# Altium PCB FRDM-TFC.PcbDoc (part 1 of 2)
Units mil, origin at the board's own origin, x right, y up, seen from the top; angles counter-clockwise.
Board outline 3200 x 2100 mil, 2 copper layers (Top Layer, Bottom Layer), stack 15.3 mil thick; 77 components, 81 nets, 511 pads, 817 vias.
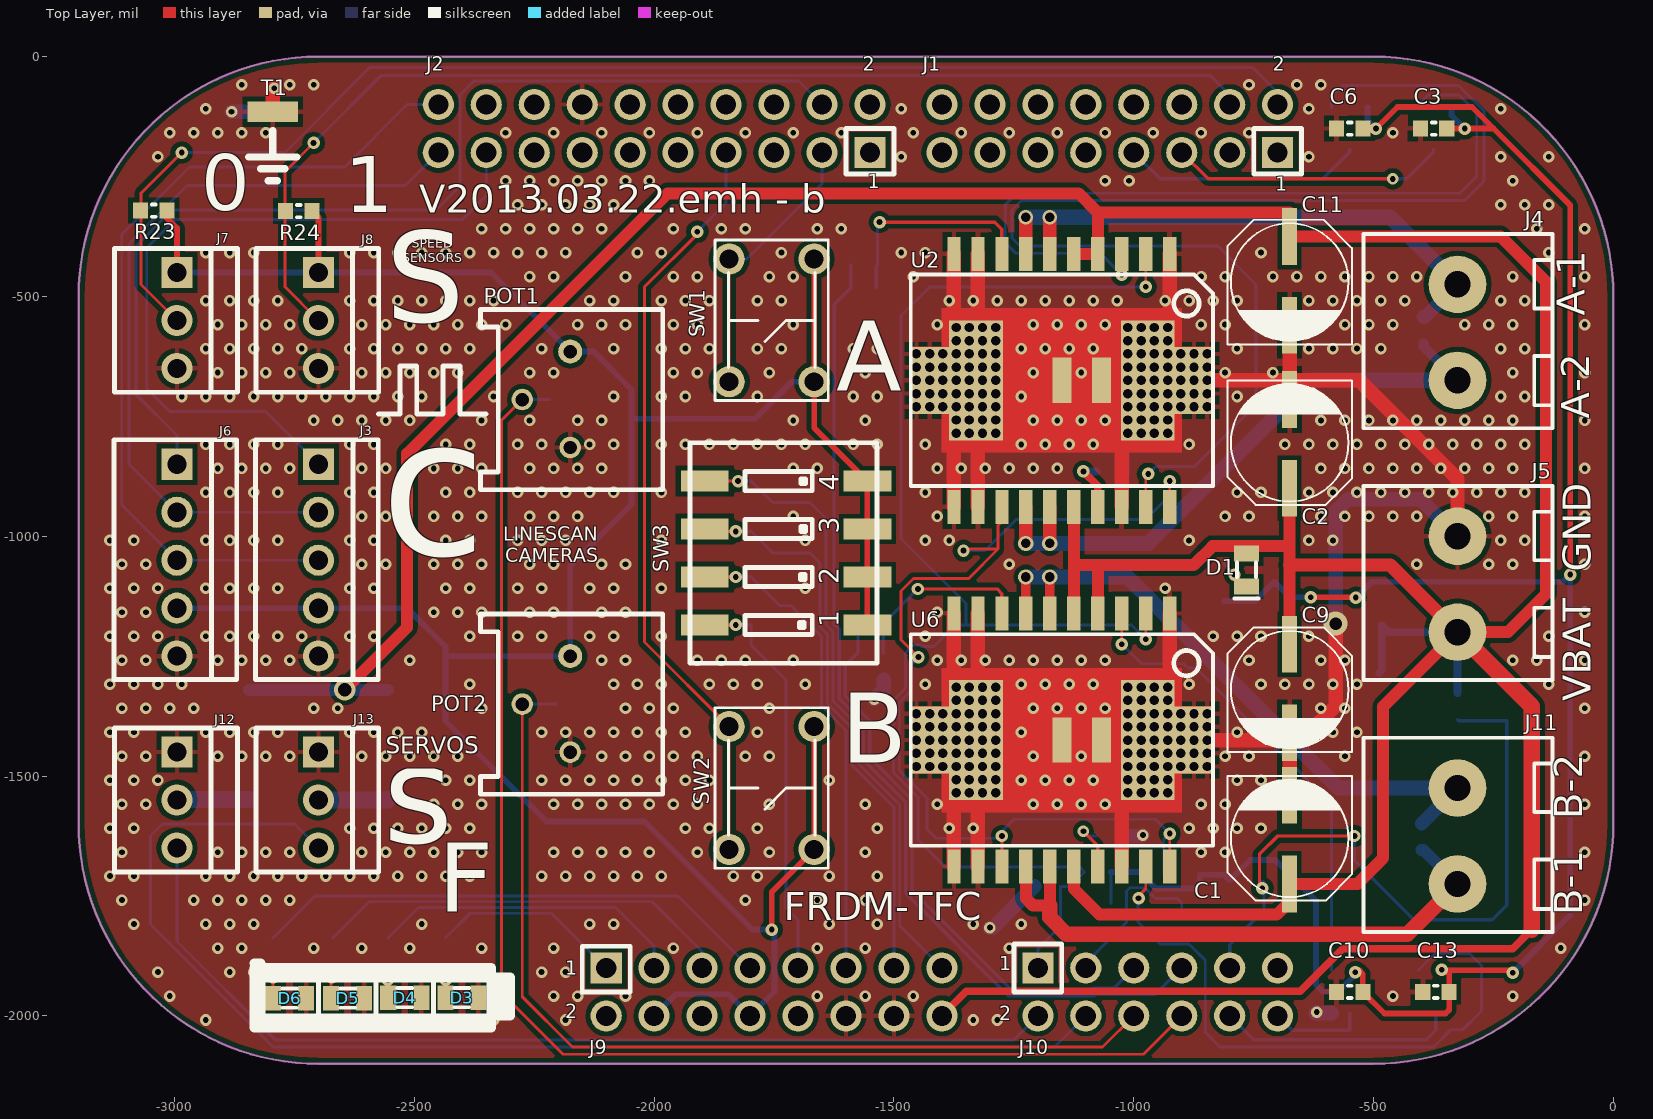
[diagram p0: Top Layer view]
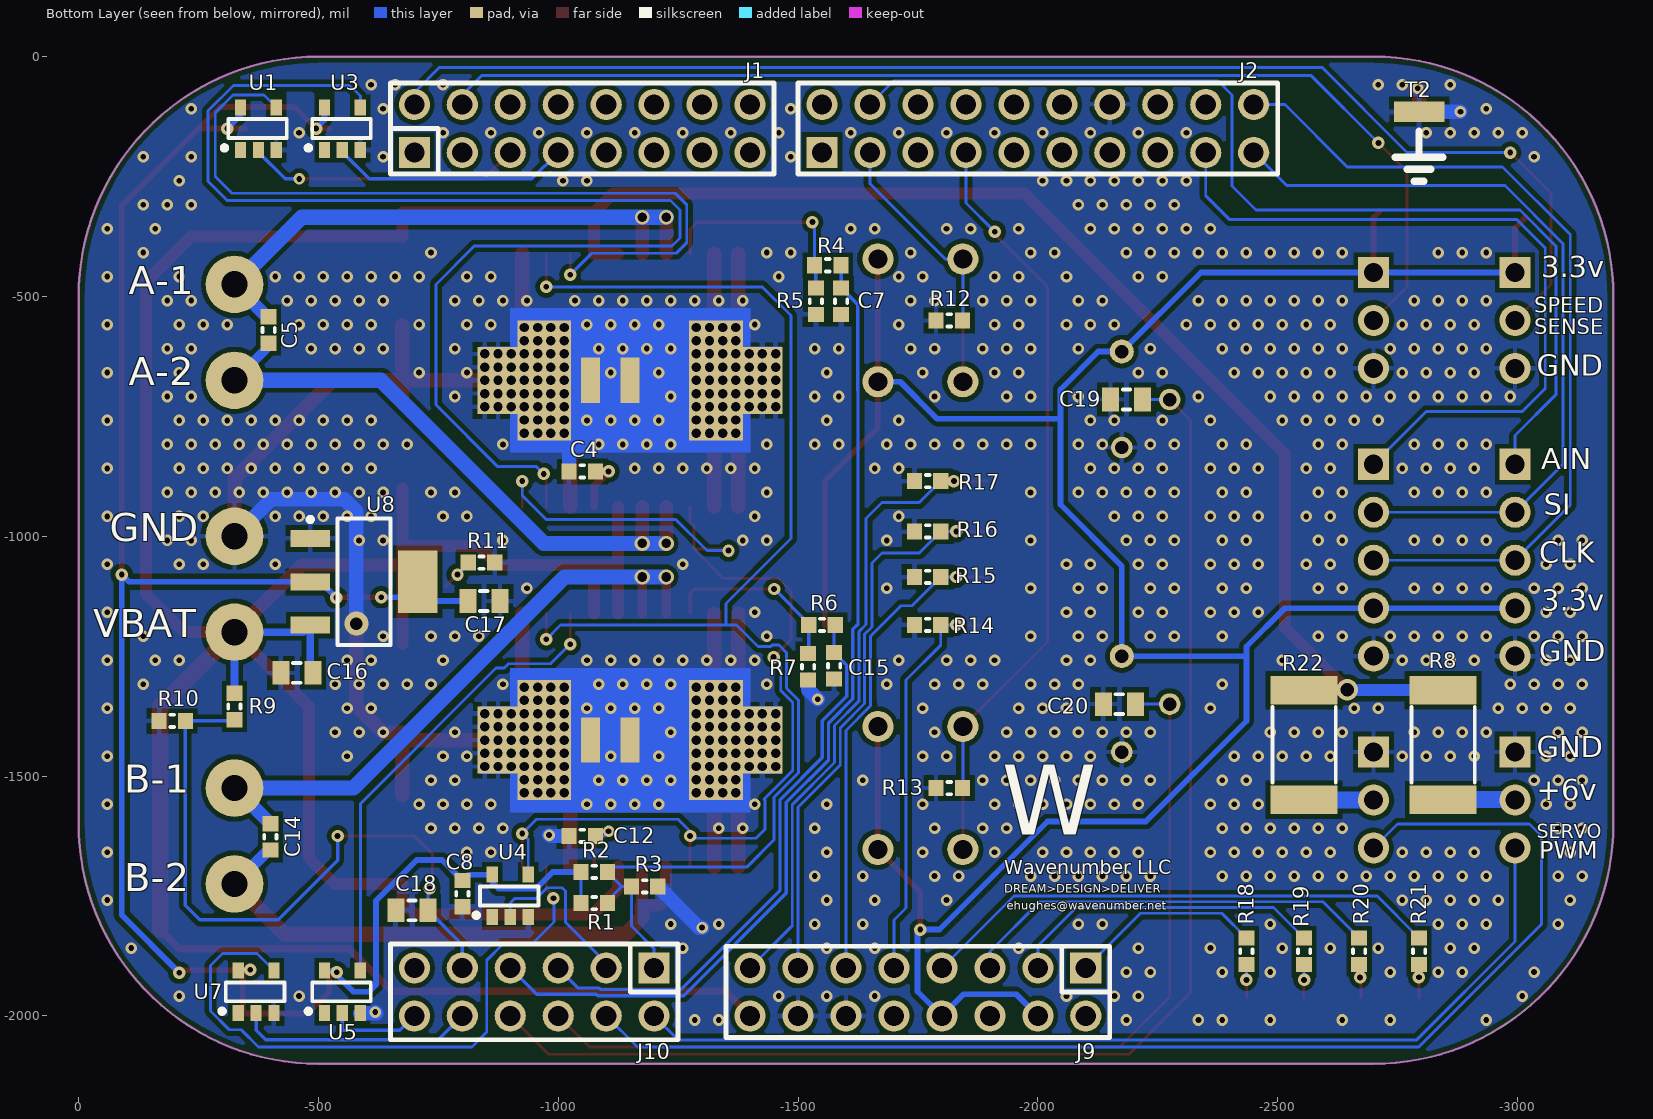
[diagram p1: Bottom Layer view, seen from below]
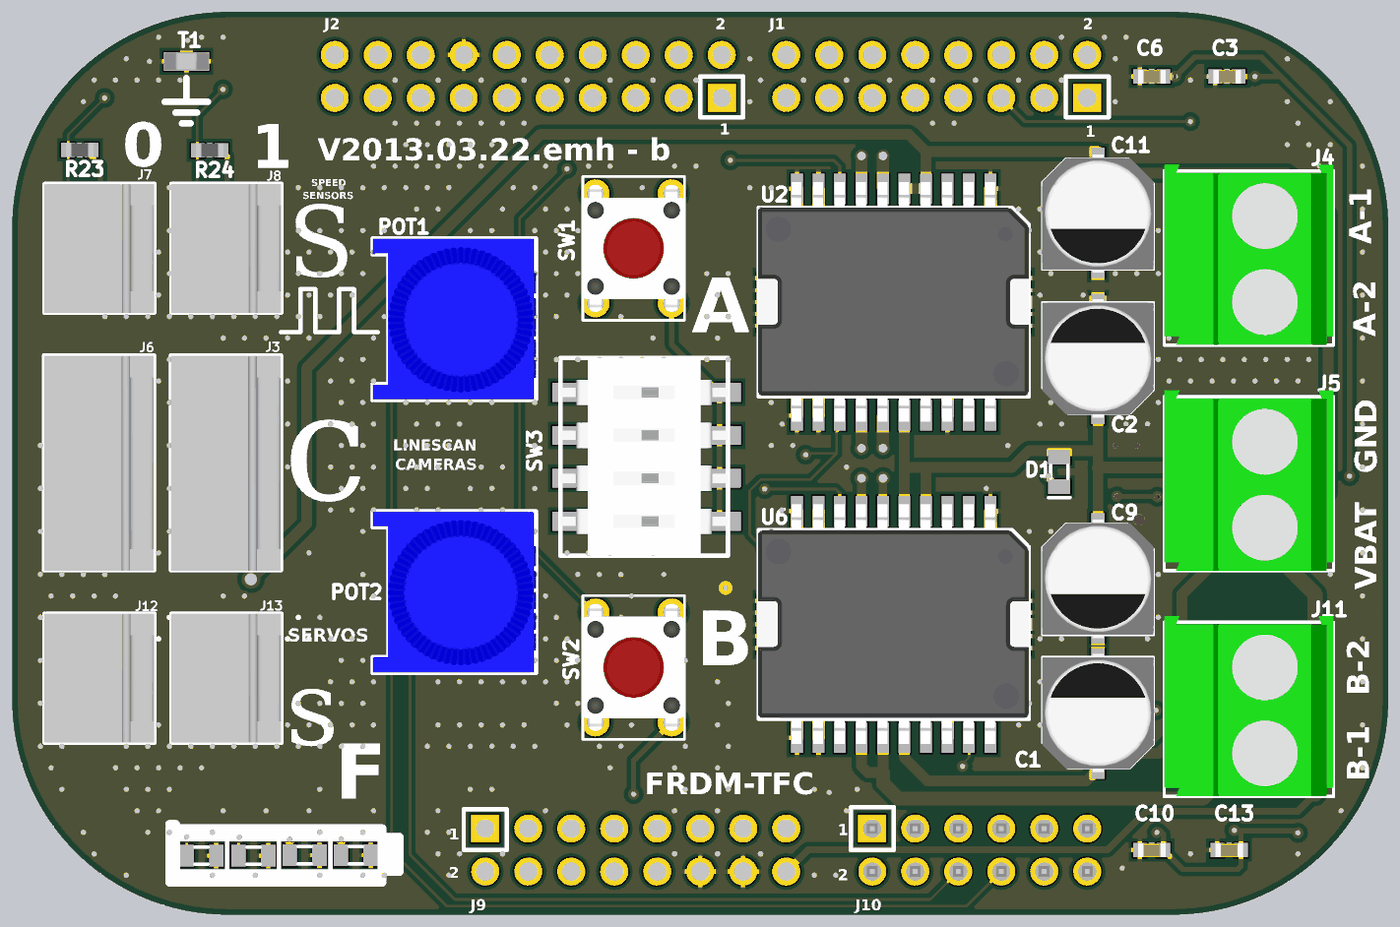
[diagram p3: 3D render of the assembled board from above, using the file's embedded part models]
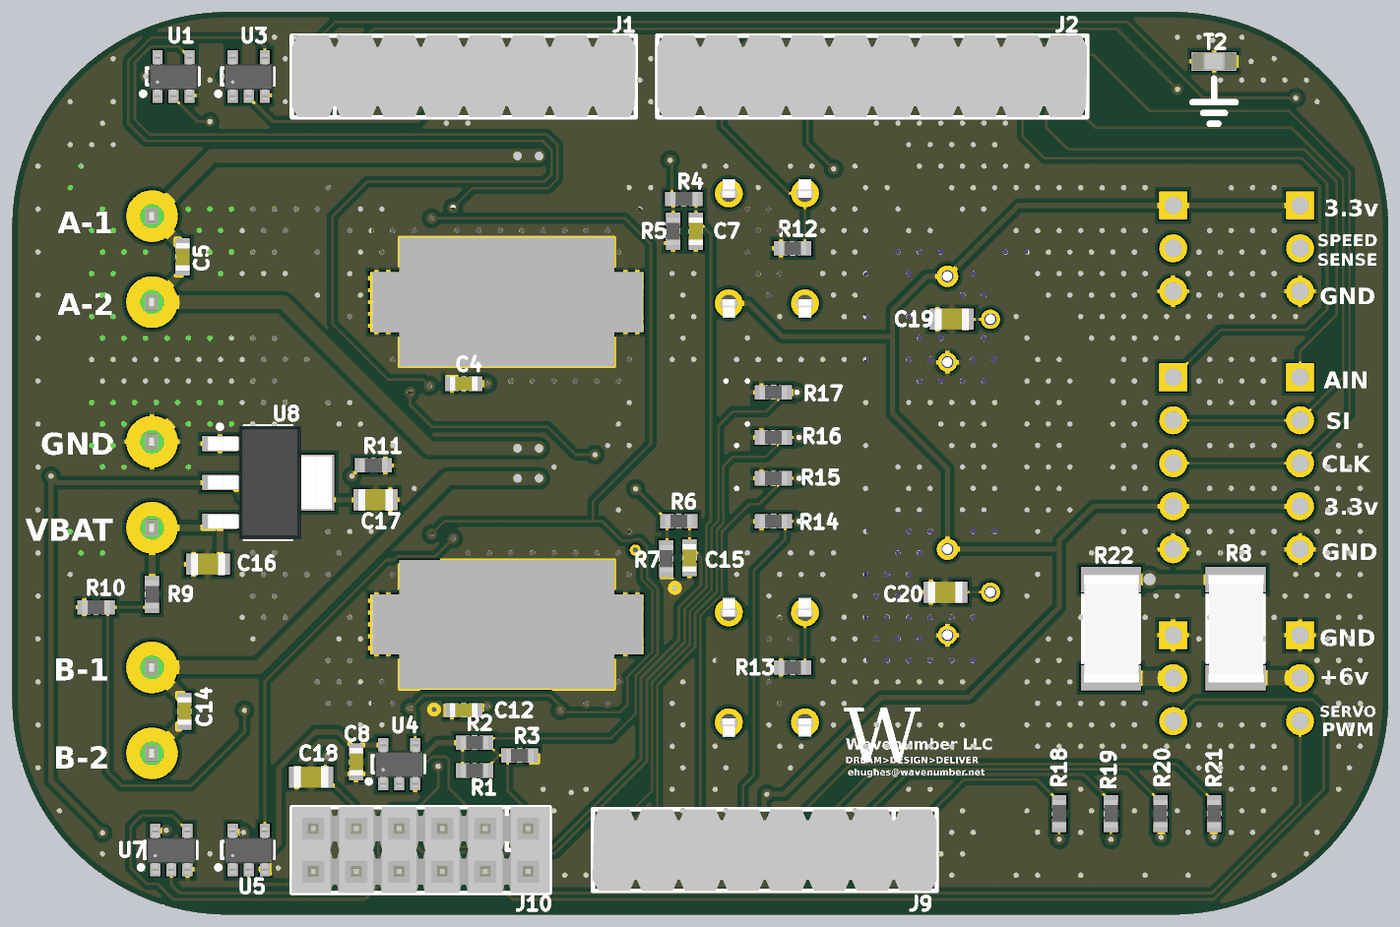
[diagram p4: 3D render of the assembled board from below, using the file's embedded part models]

## Layer stack, top to bottom
Top Layer: signal copper 1.4
Dielectric: core 12.5, FR-4, Dk 4.8
Bottom Layer: signal copper 1.4

## Board outline
-3200,-1600 ccw(c-2700,-1600) -2700,-2100 -500,-2100 ccw(c-500,-1600) 0,-1600 0,-500 ccw(c-500,-500) -500,0 -2700,0 ccw(c-2700,-500) -3200,-500

## Design rules (kind name [scope] priority, off if disabled: settings)
Clearance Polygon [(InNet('GND') AND InPoly)] p1: gap=10
Clearance [All] p2: gap=6
ComponentClearance [All] p1: gap=0 collisioncheckmode=3 verticalgap=0 showdistances=FALSE
Height [All] p1: minheight=0 maxheight=1500 prefheight=500
HoleSize [All] p1: absolutevalues=TRUE maxlimit=250 minlimit=1 maxpercent=80.000 minpercent=20.000
HoleToHoleClearance [All] p1: gap=2 allowstackedmicrovias=TRUE
MinimumSolderMaskSliver [All] p1: minsoldermaskwidth=0
PlaneConnect [All] p1: planeconnectstyle=Direct reliefexpansion=20 reliefentries=4 reliefconductorwidth=10 reliefairgap=10
PolygonConnect PolygonConnect_1 [IsVia] p1: connectstyle=Direct reliefconductorwidth=10 reliefentries=4 polygonreliefangle="90 Angle" airgapwidth=10
PolygonConnect [All] p2: connectstyle=Relief reliefconductorwidth=10 reliefentries=4 polygonreliefangle="90 Angle" airgapwidth=10
RoutingVias [All] p1: holewidth=12 width=24 viastyle="Through Hole" minholewidth=12 minwidth=24 maxholewidth=50 maxwidth=100
ShortCircuit ShortCircuit_1 [HasFootprint('4-40 X 250') vs HasFootprint('4-40 X 250')] p1: allowed=TRUE
ShortCircuit [All] p2: allowed=FALSE
SilkToSilkClearance [All] p1: silktosilkclearance=0
SilkToSolderMaskClearance SilkscreenOverComponentPads [IsPad] p1: minsilkscreentomaskgap=0 clearancetoexposedcopper=TRUE
SolderMaskExpansion [All] p1: expansion=4
Width [All] p1: maxlimit=100 minlimit=6 preferedwidth=6
19 further rules are at their usual default settings.

## Classes and differential pairs
component class FRDM-TFC: C16 C17 C18 C19 C20 D1 D3 D4 D5 D6 J1 J2 J3 J4 J5 J6 J7 J8 J9 J10 J11 J12 J13 POT1 POT2 R8 R9 R10 R11 R12 R13 R14 R15 R16 R17 R18 R19 R20 R21 R22 R23 R24 SW1 SW2 SW3 T1 T2 U8
component class U_H-BRIDGE: C1 C2 C3 C4 C5 C6 C7 C8 C9 C10 C11 C12 C13 C14 C15 R1 R2 R3 R4 R5 R6 R7 U1 U2 U3 U4 U5 U6 U7 U24

## Components (designator, comment, footprint, x,y, rotation, side; value= is the part's Value field where it differs from the comment)
C1 "47uF" PANASONIC_D -675,-1500 r180 top
C2 "47uF" PANASONIC_D -675,-675 r180 top
C3 "0.1uF" C0603 -375,-150 r0 top
C4 "33nF" C0603 -1050,-865 r0 bottom
C5 "33nF" C0603 -396,-570 r90 bottom
C6 "0.1uF" C0603 -550,-150 r0 top
C7 "0.1uF" C0603 -1590,-510 r270 bottom
C8 "0.1uF" C0603 -800,-1745 r90 bottom
C9 "47uF" PANASONIC_D -675,-1450 r0 top
C10 "0.1uF" C0603 -550,-1950 r0 top
C11 "47uF" PANASONIC_D -675,-600 r0 top
C12 "33nF" C0603 -1050,-1625 r0 bottom
C13 "0.1uF" C0603 -370,-1950 r0 top
C14 "33nF" C0603 -400,-1627 r90 bottom
C15 "0.1uF" C0603 -1575,-1270 r270 bottom
C16 "1.0uF" C0805 -455,-1285 r0 bottom
C17 "1.0uF" C0805 -845,-1135 r180 bottom
C18 "1.0uF" C0805 -695,-1780 r180 bottom
C19 "1.0uF" C0805 -2185,-715 r180 bottom
C20 "1.0uF" C0805 -2170,-1350 r180 bottom
D1 "Value" "LED_0805 - GREEN" -765,-1070 r270 top
D3 "Value" "LED_0805 - GREEN" -2401,-1962 r0 top
D4 "Value" "LED_0805 - GREEN" -2520,-1962 r0 top
D5 "Value" "LED_0805 - GREEN" -2639,-1963 r0 top
D6 "Value" "LED_0805 - GREEN" -2760,-1963 r0 top
J1 "67996-416HLF" 67996-416HLF -1050,-150 r180 bottom locked
J2 "67996-420HLF" 67996-420HLF -2000,-150 r180 bottom locked
J3 "640454-5" 640454-5 -2700,-1050 r270 top locked
J4 "282857-2" 282857-2 -325,-575 r90 top locked
J5 "282857-2" 282857-2 -325,-1100 r90 top
J6 "640454-5" 640454-5 -2995,-1050 r270 top locked
J7 "640454-3" 640454-3 -2995,-550 r270 top locked
J8 "640454-3" 640454-3 -2700,-550 r270 top
J9 "67996-416HLF" 67996-416HLF -1750,-1950 r0 bottom locked
J10 "67996-412HLF" 67996-412HLF -950,-1950 r0 bottom locked
J11 "282857-2" 282857-2 -325,-1625 r90 top
J12 "640454-3" 640454-3 -2995,-1550 r270 top
J13 "640454-3" 640454-3 -2700,-1550 r270 top
POT1 "100k" 3386P -2225,-715 r270 top
POT2 "100k" 3386P -2225,-1350 r270 top
R1 "10k" R0603 -1075,-1765 r0 bottom
R2 "10k" R0603 -1075,-1700 r0 bottom
R3 "10k" R0603 -1180,-1730 r0 bottom
R4 "10k" R0603 -1562,-435 r180 bottom
R5 "220" R0603 -1537,-510 r90 bottom
R6 "10k" R0603 -1550,-1185 r180 bottom
R7 "220" R0603 -1521,-1272 r90 bottom
R8 "1" R2512 -2845,-1435 r270 bottom
R9 "47k" R0603 -325,-1355 r270 bottom
R10 "10k" R0603 -195,-1385 r0 bottom
R11 "470" R0603 -840,-1055 r0 bottom
R12 "10k" R0603 -1815,-550 r180 bottom
R13 "10k" R0603 -1815,-1525 r180 bottom
R14 "10k" R0603 -1770,-1185 r180 bottom
R15 "10k" R0603 -1770,-1085 r180 bottom
R16 "10k" R0603 -1770,-990 r180 bottom
R17 "10k" R0603 -1770,-885 r180 bottom
R18 "220" R0603 -2435,-1865 r270 bottom
R19 "220" R0603 -2555,-1865 r270 bottom
R20 "220" R0603 -2670,-1865 r270 bottom
R21 "220" R0603 -2795,-1865 r270 bottom
R22 "1" R2512 -2555,-1435 r270 bottom
R23 "10k" R0603 -3043,-321 r0 top
R24 "10k" R0603 -2741,-322 r0 top
SW1 "EVQ-PAG05R" EVQ-PAG05R -1755,-550 r180 top
SW2 "EVQ-PAG05R" EVQ-PAG05R -1755,-1525 r180 top
SW3 "219-4MST" 219-4MST -1725,-1035 r90 top
T1 "PC TEST POINT MINIATURE SMT" SMT_TEST_5015 -2795,-115 r0 top
T2 "PC TEST POINT MINIATURE SMT" SMT_TEST_5015 -2795,-115 r0 bottom
U1 "M74VHC1GT50DTT1G" SOT95P245X145-5L -375,-150 r90 bottom
U2 "MC33887APVW" "FREESCALE HSOP-20" -1150,-675 r270 top
U3 "M74VHC1GT50DTT1G" SOT95P245X145-5L -550,-150 r90 bottom
U4 "M74VHC1GT50DTT1G" SOT95P245X145-5L -900,-1750 r90 bottom
U5 "M74VHC1GT50DTT1G" SOT95P245X145-5L -550,-1950 r90 bottom
U6 "MC33887APVW" "FREESCALE HSOP-20" -1150,-1425 r270 top
U7 "M74VHC1GT50DTT1G" SOT95P245X145-5L -370,-1950 r90 bottom
U8 "NCV1117ST50T3G" SOT223 -595,-1095 r180 bottom

## Footprints (in the part's own frame and the unit in brackets; to place one, negate y for a bottom-side part, rotate by r counter-clockwise, add the part's x,y. Pads: shape width x height; smd on the part's side, far side on the other; paste and mask are expansions set on the pad)
219-4MST [mil] "SWITCH TAPE SEAL 4 POS SMD"
  rect 44x100 smd: 1(-150,-169.5) 2(-150,169.5) 3(-50,-169.5) 4(-50,169.5) 5(50,-169.5) 6(50,169.5) 7(150,-169.5) 8(150,169.5)
  silkscreen extent -230,-190 230,200, body extent -229,-190 229,201, height 168
3386P [mil] "Pot with Knob"
  round 50 hole 28: 1(-100,50)
  round 45 hole 28: 2(0,-50) 3(100,50)
  silkscreen extent -188,-137 188,243, body extent -188,-137 187,243, height 400
67996-412HLF [mil] "CONN HEADER 12POS .100 STR TIN"
  rect 65x65 hole 42: 1(-250,-50)
  round 65 hole 42: 2(-250,50) 3(-150,-50) 4(-150,50) 5(-50,-50) 6(-50,50) 7(50,-50) 8(50,50) 9(150,-50) 10(150,50) 11(250,-50) 12(250,50)
  silkscreen extent -300,-100 300,100, body extent -300,-100 300,100, height 331
67996-416HLF [mil] "CONN HEADER 16POS .100 STR TIN"
  rect 65x65 hole 42: 1(-350,-50)
  round 65 hole 42: 2(-350,50) 3(-250,-50) 4(-250,50) 5(-150,-50) 6(-150,50) 7(-50,-50) 8(-50,50) 9(50,-50) 10(50,50) 11(150,-50) 12(150,50) 13(250,-50) 14(250,50) 15(350,-50) 16(350,50)
  silkscreen extent -400,-95 400,95, body extent -400,-95 400,95, height 305
67996-420HLF [mil] "CONN HEADER 20POS .100 STR TIN"
  rect 65x65 hole 42: 1(-450,-50)
  round 65 hole 42: 2(-450,50) 3(-350,-50) 4(-350,50) 5(-250,-50) 6(-250,50) 7(-150,-50) 8(-150,50) 9(-50,-50) 10(-50,50) 11(50,-50) 12(50,50) 13(150,-50) 14(150,50) 15(250,-50) 16(250,50) 17(350,-50) 18(350,50) 19(450,-50) 20(450,50)
  silkscreen extent -500,-95 500,95, body extent -500,-95 500,95, height 305
282857-2 [mil] "TERM BLOCK 2POS SIDE ENT 5.08MM"
  round 120 hole 55: 1(-100,0) 2(100,0)
  silkscreen extent -200,-198 205,196, body extent -200,-198 220,196, height 752
640454-3 [mil] "CONN HEADER VERT 3POS .100 TIN"
  rect 65x65 hole 40: 1(-100,0)
  round 65 hole 40: 2(0,0) 3(100,0)
  silkscreen extent -150,-130 150,126, body extent -150,-130 150,125, height 395
640454-5 [mil]
  rect 65x65 hole 40: 1(-200,0)
  round 65 hole 40: 2(-100,0) 3(0,0) 4(100,0) 5(200,0)
  silkscreen extent -251,-131 249,125, body extent -250,-131 250,124, height 394
C0603 [mm] "0603 Generic"
  rect 0.8x0.85 smd: 1(-0.7,0) 2(0.7,0)
  silkscreen extent -0.1,-0.33 0.1,0.33, body extent -0.8,-0.42 0.82,0.4, height 0.46
C0805 [mm] "0805 Generic"
  rect 0.9x1.25 smd: 1(-0.85,0) 2(0.85,0)
  silkscreen extent -0.2,-0.53 0.2,0.53, body extent -1.02,-0.64 1,0.63, height 0.61
EVQ-PAG05R [mm] "SWITCH LT 6MM 260GF 5MM HEIGHT"
  round 1.651 hole 1: A(-2.25,3.25) A(-2.25,-3.25) B(2.25,3.25) B(2.25,-3.25)
  silkscreen extent -3,-4.25 3,4.25, body extent -3,-4.11 3,4.11, height 4.5
"FREESCALE HSOP-20" [mm] "98ASH7072A"
  rect 1.8x0.7 smd: 1(-6.7,5.715) 2(-6.7,4.445) 3(-6.7,3.175) 4(-6.7,1.905) 5(-6.7,0.635) 6(-6.7,-0.635) 7(-6.7,-1.905) 8(-6.7,-3.175) 9(-6.7,-4.445) 10(-6.7,-5.715) 11(6.7,-5.715) 12(6.7,-4.445) 13(6.7,-3.175) 14(6.7,-1.905) 15(6.7,-0.635) 16(6.7,0.635) 17(6.7,1.905) 18(6.7,3.175) 19(6.7,4.445) 20(6.7,5.715)
  rect 0.75x0.75 hole 0.5: HEATSINK(-2.8,-5.6) HEATSINK(-2.8,5.6) HEATSINK(-2.8,3.5) HEATSINK(-2.8,4.2) HEATSINK(-2.8,4.9) HEATSINK(-2.8,-4.9) HEATSINK(-2.8,-4.2) HEATSINK(-2.8,-3.5) HEATSINK(-2.1,5.6) HEATSINK(-2.1,3.5) HEATSINK(-2.1,4.2) HEATSINK(-2.1,4.9) HEATSINK(-2.1,-4.9) HEATSINK(-2.1,-4.2) HEATSINK(-2.1,-3.5) HEATSINK(-2.1,-5.6) HEATSINK(-1.4,7.7) HEATSINK(-1.4,7) HEATSINK(-1.4,5.6) HEATSINK(-1.4,6.3) HEATSINK(-1.4,4.9) HEATSINK(-1.4,3.5) HEATSINK(-1.4,4.2) HEATSINK(-1.4,-4.2) HEATSINK(-1.4,-3.5) HEATSINK(-1.4,-4.9) HEATSINK(-1.4,-6.3) HEATSINK(-1.4,-5.6) HEATSINK(-1.4,-7) HEATSINK(-1.4,-7.7) HEATSINK(-0.7,7.7) HEATSINK(-0.7,7) HEATSINK(-0.7,6.3) HEATSINK(-0.7,5.6) HEATSINK(-0.7,4.9) HEATSINK(-0.7,4.2) HEATSINK(-0.7,3.5) HEATSINK(-0.7,-3.5) HEATSINK(-0.7,-4.2) HEATSINK(-0.7,-4.9) HEATSINK(-0.7,-5.6) HEATSINK(-0.7,-6.3) HEATSINK(-0.7,-7) HEATSINK(-0.7,-7.7) HEATSINK(0,7.7) HEATSINK(0,7) HEATSINK(0,6.3) HEATSINK(0,5.6) HEATSINK(0,4.9) HEATSINK(0,4.2) HEATSINK(0,3.5) HEATSINK(0,-3.5) HEATSINK(0,-4.2) HEATSINK(0,-4.9) HEATSINK(0,-5.6) HEATSINK(0,-6.3) HEATSINK(0,-7) HEATSINK(0,-7.7) HEATSINK(0.7,7.7) HEATSINK(0.7,7) HEATSINK(0.7,6.3) HEATSINK(0.7,5.6) HEATSINK(0.7,4.9) HEATSINK(0.7,4.2) HEATSINK(0.7,3.5) HEATSINK(0.7,-3.5) HEATSINK(0.7,-4.2) HEATSINK(0.7,-4.9) HEATSINK(0.7,-5.6) HEATSINK(0.7,-6.3) HEATSINK(0.7,-7) HEATSINK(0.7,-7.7) HEATSINK(1.4,7.7) HEATSINK(1.4,7) HEATSINK(1.4,5.6) HEATSINK(1.4,6.3) HEATSINK(1.4,4.9) HEATSINK(1.4,3.5) HEATSINK(1.4,4.2) HEATSINK(1.4,-4.2) HEATSINK(1.4,-3.5) HEATSINK(1.4,-4.9) HEATSINK(1.4,-6.3) HEATSINK(1.4,-5.6) HEATSINK(1.4,-7) HEATSINK(1.4,-7.7) HEATSINK(2.1,5.6) HEATSINK(2.1,3.5) HEATSINK(2.1,4.2) HEATSINK(2.1,4.9) HEATSINK(2.1,-4.9) HEATSINK(2.1,-4.2) HEATSINK(2.1,-3.5) HEATSINK(2.1,-5.6) HEATSINK(2.8,-5.6) HEATSINK(2.8,5.6) HEATSINK(2.8,3.5) HEATSINK(2.8,4.2) HEATSINK(2.8,4.9) HEATSINK(2.8,-4.9) HEATSINK(2.8,-4.2) HEATSINK(2.8,-3.5)
  rect 1x1 smd far side: HEATSINK(-0.7,2.1) HEATSINK(-0.7,0) HEATSINK(0,2.1) HEATSINK(0,0) HEATSINK(0.7,2.1) HEATSINK(0.7,0)
  rect 1x1 smd: HEATSINK(-0.7,2.1) HEATSINK(-0.7,0) HEATSINK(0,2.1) HEATSINK(0,0) HEATSINK(0.7,2.1) HEATSINK(0.7,0)
  Top Layer region: -1.778,6.35 -3.81,6.35 -3.81,-6.35 -1.778,-6.35 -1.778,-8.025 1.778,-8.025 1.778,-6.35 3.81,-6.35 3.81,6.35 1.778,6.35 1.778,7.925 -1.778,7.925
  Bottom Layer region: -1.778,6.35 -3.81,6.35 -3.81,-6.35 -1.778,-6.35 -1.778,-8.025 1.778,-8.025 1.778,-6.35 3.81,-6.35 3.81,6.35 1.778,6.35 1.778,7.925 -1.778,7.925
  silkscreen extent -5.6,-8 5.6,8, body extent -7.11,-8.02 7.05,7.98, height 3.29
"LED_0805 - GREEN" [mm] "LED_0805"
  rect 0.85x1.3 smd: A(-0.875,0) C(0.875,0)
  silkscreen extent -0.38,-0.63 1.52,0.64, body extent -1,-0.62 1,0.62, height 0.75
PANASONIC_D [mm] "PANASONIC_D"
  rect 0.8x3 smd: 1(0,5.715) 2(0,1.016)
  silkscreen extent -3.3,0 3.3,6.6, body extent -3.3,-0.17 3.3,6.83, height 5.41
R0603 [mm] "0603 Generic"
  rect 0.8x0.85 smd: 1(-0.7,0) 2(0.7,0)
  silkscreen extent -0.1,-0.33 0.1,0.33, body extent -0.81,-0.41 0.81,0.41, height 0.46
R2512 [mm] "R2512"
  rect 1.5x3.55 smd: 1(-2.9,0) 2(2.9,0)
  silkscreen extent -2,-1.68 2,1.68, body extent -3.3,-1.7 3.3,1.7, height 0.7
SMT_TEST_5015 [mil] "SMT_TEST"
  rect 105x43 smd: 1(0,0)
  body extent -52,-20 52,20, height 60
SOT95P245X145-5L [mm] "SOT23, 5-Leads, Body 3.1x2.6mm (max), Pitch 0.95mm, IPC High Density"
  rect 0.85x0.6 smd: 1(-1.125,0.95) 2(-1.125,0) 3(-1.125,-0.95) 4(1.125,-0.95) 5(1.125,0.95)
  silkscreen extent -1.15,-1.5 0.5,1.93, body extent -1.38,-1.45 1.32,1.45, height 1.15
SOT223 [mm] "SOT223, 4-Leads, Body 6.7x7.3mm (max), Pitch 2.30mm, IPC High Density"
  rect 2.1x0.9 smd: 1(-2.85,2.3) 2(-2.85,0) 3(-2.85,-2.3)
  rect 2.1x3.3 smd: 4(2.85,0)
  silkscreen extent -2.98,-3.35 1.4,3.42, body extent -3.54,-3.35 3.76,3.35, height 1.75

## Part data
C1 C2 C9 C11: library part EEE-1EA470WP, "CAP ELECT 47UF 25V VS SMD"
C3 C6 C7 C8 C10 C13 C15: library part GRM188R71H104KA93D, "CAP CER .1UF 50V 10% X7R 0603"
C4 C5 C12 C14: library part GRM188R71H333KA61D, "CAP CER 0.033UF 50V 10% X7R 0603"
C16 C17 C18 C19 C20: library part UMK212BJ105KG-T, "CAP CER 1.0UF 50V X5R 0805"
D1 D3 D4 D5 D6: library part APT2012CGCK, "LED 2X1.2MM 570NM GN WTR CLR SMD"
J1 J9: "CONN HEADER 16POS .100 STR TIN"
J2: "CONN HEADER 20POS .100 STR TIN"
J3 J6: "CONN HEADER VERT 5POS .100 TIN"
J4 J5 J11: "TERM BLOCK 2POS SIDE ENT 5.08MM"
J7 J8 J12 J13: "CONN HEADER VERT 3POS .100 TIN"
J10: "CONN HEADER 12POS .100 STR TIN"
POT1 POT2: library part 3386P-1-104TLF, "TRIMMER 100K OHM 0.5W TH"
R1 R2 R3 R4 R6 R10 R12 R13 R14 R15 R16 R17 R23 R24: library part ERJ-3EKF1002V, "RES 10.0K OHM 1/10W 1% 0603 SMD"
R5 R7 R18 R19 R20 R21: library part ERJ-3EKF2200V, "RES 220 OHM 1/10W 1% 0603 SMD"
R8 R22: library part ERJ-1TYJ1R0U, "RES 1.0 OHM 1W 5% 2512 SMD"
R9: library part ERJ-3EKF4702V, "RES 47.0K OHM 1/10W 1% 0603 SMD"
R11: library part ERJ-3EKF4700V, "RES 470 OHM 1/10W 1% 0603 SMD"
SW1 SW2: "SWITCH LT 6MM 260GF 5MM HEIGHT"
SW3: "SWITCH TAPE SEAL 4 POS SMD"
T1 T2: library part 5015
U1 U3 U4 U5 U7: "IC BUFF CMOS LVL/SFTR N-I SOT235"
U2 U6: "Motor / Motion / Ignition Controllers & Drivers H-BRIDGE W/LD CURNT FDBK"
U8: "Low Dropout (LDO) Regulators ANA 800mA LDO"

## Via types
v1: diameter 24, hole 12, Top Layer to Bottom Layer, tented both sides, 770 vias
v2: diameter 26, hole 12, Top Layer to Bottom Layer, tented both sides, 36 vias
v3: diameter 32, hole 20, Top Layer to Bottom Layer, tented both sides, 4 vias
v4: diameter 24, hole 12, Top Layer to Bottom Layer, 2 vias
v5: diameter 30, hole 20, Top Layer to Bottom Layer, tented both sides, 2 vias
v6: diameter 26, hole 12, Top Layer to Bottom Layer, 1 vias
v7: diameter 50, hole 26, Top Layer to Bottom Layer, tented both sides, 1 vias
v8: diameter 44, hole 28, Top Layer to Bottom Layer, tented both sides, 1 vias

## Nets (pads, with @x,y where several pads share a name; then routed paths per layer and width w, separated by ;. In a path a pad name is that pad's centre, name@x,y a point inside that pad or via, vN(x,y) a via of type N, cw(c..) or ccw(c..) an arc to the next point about the centre after c; other vN are vias at no path point)
+3.3V: J3.4 J6.4 J7.1 J8.1 J9.4 J9.8 POT1.1 POT2.1 R23.2 R24.2 SW1.A SW2.A SW3.1 SW3.3 SW3.5 SW3.7 | length 5906.2
  Top Layer w12: R23.2@-3017.44,-335 -2995,-357.44 J7.1@-2995,-450 ; R24.2@-2713.44,-322 -2700,-335.44 J8.1@-2700,-450 ; v2(-1755,-1820) -1755,-1741.54 SW2.A@-1666.42,-1652.95 SW2.A@-1666.42,-1397.05 ; SW1.A@-1666.42,-422.05 SW1.A@-1666.42,-677.95 -1666.42,-774.08 SW3.7@-1555.5,-885 SW3.5@-1555.5,-985 SW3.3@-1555.5,-1085 SW3.1@-1555.5,-1185
  Bottom Layer w12: J6.4@-2995,-1150 J3.4@-2700,-1150 -2515,-1150 -2435,-1230 -2435,-1250 ; J7.1@-2995,-450 J8.1@-2700,-450 -2340,-450 POT1.1@-2175,-615 -2126,-615 -2047,-694 -2047,-755 ; J9.4@-2000,-2000 -1955,-1955 -1845,-1955 J9.8@-1800,-2000 -1749,-1949 -1749,-1826 v2(-1755,-1820) -1795,-1820 -2020,-1595 -2225,-1595 -2435,-1385 -2435,-1250 ; SW1.A@-1666.42,-677.95 -1712.95,-677.95 -1790,-755 -2047,-755 ; -2435,-1250 POT2.1@-2175,-1250 -2175,-1062 -2047,-934 -2047,-755
+5V: C3.2 C6.2 C8.2 C10.2 C13.2 C17.1 R1.2 R2.2 U1.5 U3.5 U4.5 U5.5 U7.5 U8.2 U8.4 | length 4551.6
  Top Layer w12: v2(-631,-1127) -538,-1127 v2(-537,-1128) ; v2(-538,-1909) -534,-1909 -530,-1905 -522.44,-1912.56 C10.2@-522.44,-1950 -477.44,-1995 -350,-1995 -342.44,-1987.44 C13.2@-342.44,-1950 -342.44,-1912.56 -350,-1905 -215,-1905 v2(-210,-1910) ; C6.2@-522.44,-150 v2(-495,-150) -450,-105 -295,-105 -250,-150 ; C3.2@-347.44,-150 v2(-310,-150) -250,-150 ; v2(-90,-1080) -90,-310 -250,-150
  Bottom Layer w7: R1.2@-1047.44,-1765 R2.2@-1047.44,-1700
  Bottom Layer w12: R2.2@-1047.44,-1700 -988.62,-1700 -953.98,-1734.64 -875.36,-1734.64 -862.6,-1721.89 U4.5@-862.6,-1705.71 -811.73,-1705.71 C8.2@-800,-1717.44 -757.56,-1675 -705,-1675 -620,-1760 -620,-1935 -605,-1950 -573.58,-1950 v2@-529.29,-1905.71 ; C17.1@-811.54,-1135 -747.2,-1135 U8.4@-707.2,-1095 -675.2,-1127 v2(-631,-1127) ; v2(-537,-1128) -504,-1095 U8.2@-482.8,-1095 -105,-1095 v2(-90,-1080) -90,-1790 v2(-210,-1910) ; U3.5@-512.6,-105.71 -512.6,-132.4 v2(-495,-150) ; v2(-358,-1904) -351,-1904 -349.29,-1905.71 U7.5@-332.6,-1905.71 ; U1.5@-337.6,-105.71 -337.6,-122.4 v2(-310,-150)
+V_BATTERY: C1.1 C2.1 C9.1 C11.1 C16.1 D1.A J5.1 J9.16 R8.1 R9.1 R22.1 U2.4 U2.5 U2.16 U6.4 U6.5 U6.16 U8.3 | length 9765.7
  Top Layer w16: J9.16@-1400,-2000 -1349,-1949 -653,-1949 -564,-1860 -210,-1860 -170,-1820
  Top Layer w25: v8(-2645,-1320) -2515,-1190 -2515,-828 -1972,-285 -1115,-285 -1075,-325 ; U6.16@-1125,-1688.78 -1125,-1735 -1071,-1789 -702,-1789 -675,-1762 C1.1@-675,-1725 -534,-1725 -480,-1671 -480,-1355 J5.1@-325,-1200 -220,-1200 -140,-1120 -140,-470 -235,-375 C11.1@-675,-375 -675,-325 -1075,-325 ; U6.5@-1125,-1161.22 -1125,-1060 ; U2.16@-1125,-938.78 -1125,-1060 ; U2.5@-1125,-411.22 U2.4@-1075,-411.22 -1075,-325 ; U6.4@-1075,-1161.22 -1075,-1060 ; -679.45,-1020.55 -835.55,-1020.55 -875,-1060 -1075,-1060 ; C9.1@-675,-1225 -675,-1060 C2.1@-675,-900 ; -1125,-1060 -1075,-1060
  Top Layer w28: -675,-1060 -465,-1060 J5.1@-325,-1200
  Top Layer w35: J5.1@-325,-1200 -170,-1355 -170,-1820
  Bottom Layer w16: C16.1@-488.46,-1285 -482.8,-1279.33 U8.3@-482.8,-1185.55 -468.35,-1200 J5.1@-325,-1200 R9.1@-325,-1327.44
  Bottom Layer w25: R8.1@-2845,-1320.83 R22.1@-2555,-1320.83